# Altium PCB TLS_PWR.PcbDoc
Units mm, origin at the board's own origin, x right, y up, seen from the top; angles counter-clockwise.
Board outline 92.16 x 35.5 mm, 2 copper layers (Top Layer, Bottom Layer); 19 components, 9 nets, 40 pads, 0 vias.
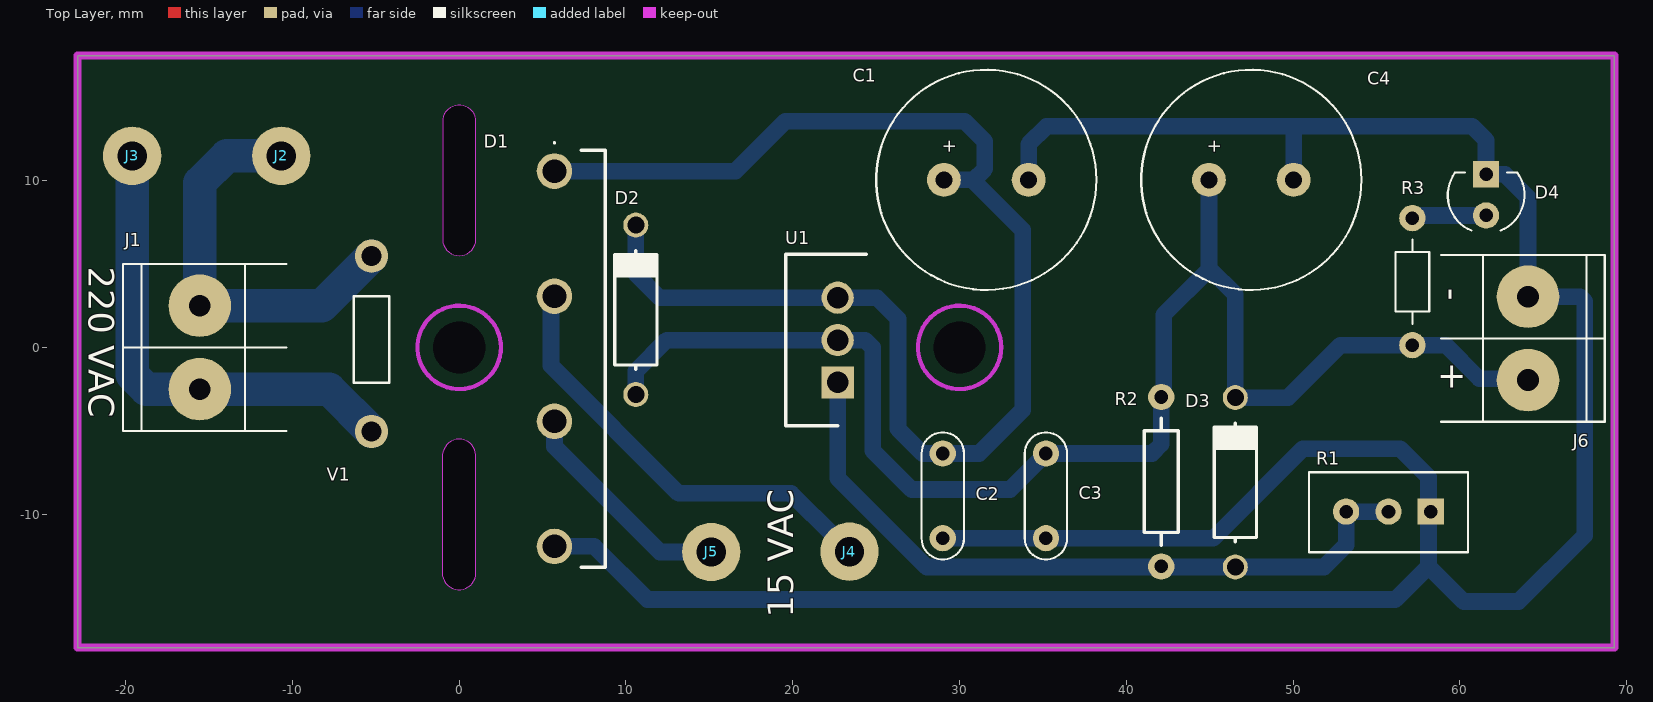
[diagram p0: Top Layer view]
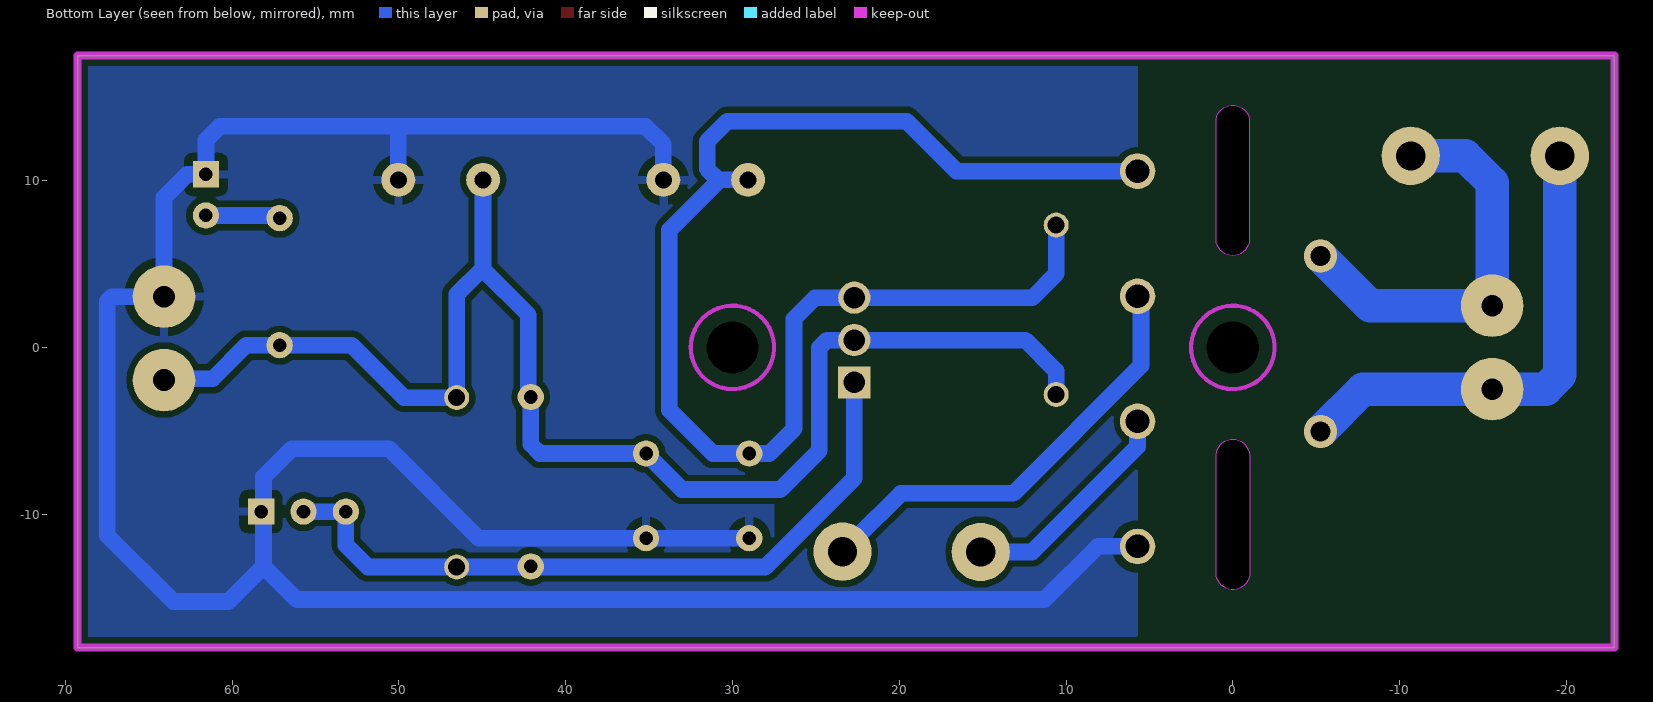
[diagram p1: Bottom Layer view, seen from below]
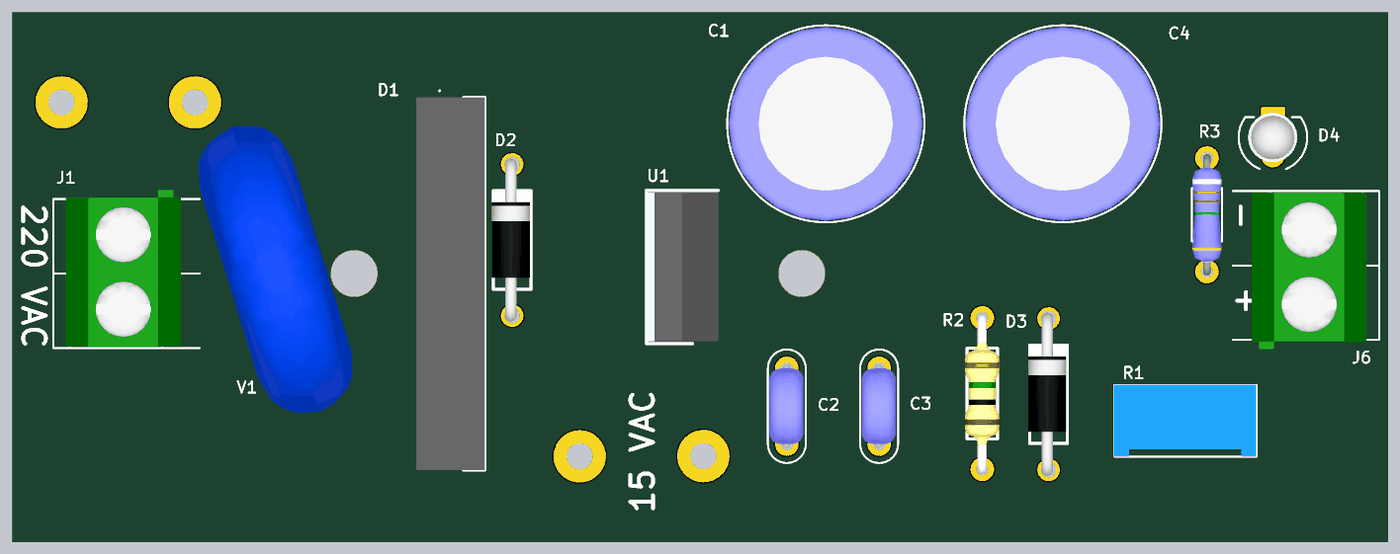
[diagram p2: 3D render of the assembled board from above, using the file's embedded part models]

## Layer stack, top to bottom
Top Solder: solder mask 0.0102, Solder Resist, Dk 3.5
Top Layer: signal copper 0.0356
Dielectric1: dielectric 0.32, FR-4, Dk 4.8
Bottom Layer: signal copper 0.0356
Bottom Solder: solder mask 0.0102, Solder Resist, Dk 3.5

## Board outline
-22.885,-18 69.271,-18 69.271,17.5 -22.885,17.5
cut-out: -1.002,-13.691 ccw(c-0.002,-13.506) 0.998,-13.691 0.998,-6.452 ccw(c-0.002,-6.505) -1.002,-6.452
cut-out: 1.002,13.691 ccw(c0.002,13.506) -0.998,13.691 -0.998,6.452 ccw(c0.002,6.505) 1.002,6.452

## Design rules (kind name [scope] priority, off if disabled: settings)
Clearance Clearance_POLY [InPolygon] p1: gap=0.381 ignorepadtopadclearanceinfootprint=FALSE except(0: Arc-Hole Track-Hole SMDPad-Hole THPad-Hole Via-Hole Fill-Hole Poly-Hole Region-Hole Text-Hole)
Clearance Clearance_U [HasFootprint('MSOP8')] p2: gap=0.203 ignorepadtopadclearanceinfootprint=FALSE except(0: Arc-Hole Track-Hole SMDPad-Hole THPad-Hole Via-Hole Fill-Hole Poly-Hole Region-Hole Text-Hole)
Clearance [All] p3: gap=0.203 ignorepadtopadclearanceinfootprint=FALSE except(0: Arc-Hole Track-Hole SMDPad-Hole THPad-Hole Via-Hole Fill-Hole Poly-Hole Region-Hole Text-Hole)
Height [All] p1: minheight=0 maxheight=50.8 prefheight=12.7
MinimumSolderMaskSliver [All] p1: minsoldermaskwidth=0.07
PolygonConnect Poly_Direct [OnLayer('Top Layer') or OnLayer('Bottom Layer')] p1: connectstyle=Relief reliefconductorwidth=0.508 reliefentries=4 polygonreliefangle="90 Angle" airgapwidth=0.508
PolygonConnect IsVia [IsVia] p2: connectstyle=Direct reliefconductorwidth=0.254 reliefentries=4 polygonreliefangle="90 Angle" airgapwidth=0.254
PolygonConnect [All] p3: connectstyle=Relief reliefconductorwidth=0.254 reliefentries=4 polygonreliefangle="90 Angle" airgapwidth=0.254
RoutingVias [All] p1: holewidth=0.711 width=1.27 viastyle="Through Hole" minholewidth=0.2 minwidth=0.5 maxholewidth=0.711 maxwidth=1.27
SilkToSilkClearance [All] p1: silktosilkclearance=0.17
SilkToSolderMaskClearance SilkscreenOverComponentPads [IsPad] p1: minsilkscreentomaskgap=0.1 clearancetoexposedcopper=TRUE
SolderMaskExpansion [All] p1: expansion=0.102
Width Logo [HasFootprint('LOGO_GL_5mm_BOARD')] p1: maxlimit=0.254 minlimit=0.01 preferedwidth=0.254
Width Width_VIN [InNet('VIN') OR InNet('NetD2_1')] p2: maxlimit=1 minlimit=0.254 preferedwidth=0.762
Width [All] p3: maxlimit=4 minlimit=0.318 preferedwidth=1
26 further rules are at their usual default settings.

## Classes and differential pairs
component class TLS_PWR: C1 C2 C3 C4 D1 D2 D3 D4 J1 J2 J3 J4 J5 J6 R1 R2 R3 U1

## Components (designator, comment, footprint, x,y, rotation, side; value= is the part's Value field where it differs from the comment)
C1 "220uF 50V" CAP500RP 31.605,10.047 r0 top
C2 "0.1uF 63V" CAP200 28.995,-8.903 r270 top
C3 "0.1uF 63V" CAP200 35.182,-8.903 r270 top
C4 "220uF 50V" CAP500RP 47.495,10.047 r0 top
D1 "KBJ406G" KBJ 5.712,10.566 r270 top
D2 "1N4007" DO41 10.591,2.25 r90 top
D3 "1N4007" DO41 46.536,-8.093 r90 top
D4 "RED" LED3_R 61.573,9.131 r90 top
J1 "BORNERA CON TORNILLO" BORNERA2 -15.555,-0.003 r0 top
J2 "PIN CABLE" PIN_CABLE#1 -10.668,11.481 r0 top
J3 "PIN CABLE" PIN_CABLE#2 -19.609,12.381 r0 top
J4 "PIN CABLE" PIN_CABLE#3 23.402,-10.25 r0 top
J5 "PIN CABLE" PIN_CABLE#1 15.113,-12.268 r0 top
J6 "BORNERA CON TORNILLO" BORNERA2 64.087,0.541 r180 top
R1 "10K" 3296W 60.485,-12.287 r180 top
R2 "220R" RES400 42.095,-13.136 r90 top
R3 "1K" RES300 57.152,7.75 r270 top
U1 "LM317" TO220 22.695,-2.103 r90 top
V1 "250V" VARTH_20 -5.258,5.472 r180 top

## Footprints (in the part's own frame and the unit in brackets; to place one, negate y for a bottom-side part, rotate by r counter-clockwise, add the part's x,y. Pads: shape width x height; smd on the part's side, far side on the other; paste and mask are expansions set on the pad)
3296W [mil]
  rect 62x62 hole 32: 1(87.6,-96.06)
  round 62 hole 32: 2(187.6,-96.06) 3(287.6,-96.06)
  silkscreen extent 0,-189 375,0, body extent 1,-190 376,0, height 375
BORNERA2 [mm] "Bornera con Tornillos 5mm separación"
  round 3.75 hole 1.3: 1(0,2.5) 2(0,-2.5)
  silkscreen extent -4.6,-5 5.2,5, body extent -3.76,-4.89 3.94,5.61, height 10
CAP200 [mil]
  round 62 hole 32: 1(-100,0) 2(100,0)
  silkscreen extent -150,-50 150,50, body extent -110,-46 110,44, height 246
CAP500RP [mil]
  round 80 hole 40: 1(-100,0) 2(100,0)
  silkscreen extent -260,-260 260,260, body extent -256,-256 256,256, height 827
DO41 [mm]
  round 1.5 hole 1.016: 1(-5.08,0) 2(5.08,0)
  silkscreen extent -3.56,-1.27 3.56,1.27, body extent -5.46,-1.19 5.46,1.37, height 2.03
KBJ [mm] "BRIDGE"
  round 2.13 hole 1.42: 1(0,0) 2(7.5,0) 3(22.5,0) 4(15,0)
  silkscreen extent -1.75,-0.05 23.75,3.05, body extent -1.25,-1.55 23.75,3.05, height 19.1
LED3_R [mil]
  round 62 hole 32: 1(-48,0)
  rect 62x62 hole 32: 2(49,0)
  silkscreen extent -84,-90 54,90, body extent -65,-64 65,65, height 94
PIN_CABLE#1 [mm]
  round 3.5 hole 1.75: 1(0,0)
PIN_CABLE#2 [mm]
  round 3.5 hole 1.75: 1(0,-0.9)
PIN_CABLE#3 [mm]
  round 3.5 hole 1.75: 1(0,-2)
RES300 [mil]
  round 62 hole 32: 1(0,0) 2(300,0)
  silkscreen extent 50,-40 250,40, body extent -10,-38 310,38, height 79
RES400 [mil]
  round 62 hole 32: 1(0,0) 2(400,0)
  silkscreen extent 50,-40 350,40, body extent -12,-45 412,46, height 96
TO220 [mm]
  rect 1.935x1.935 hole 1.29: 1(0,0)
  round 1.935 hole 1.29: 2(2.54,0) 3(5.08,0)
  silkscreen extent -2.6,-1.71 7.68,3.11, body extent -2.44,-1.71 7.52,3.11, height 18.48
VARTH_20 [mm] "Diam 20mm"
  round 2 hole 1.2: 1(0,0) 2(0,10.516)
  silkscreen extent -1.07,2.42 1.07,7.6, body extent -6.02,-5.32 6.05,15.71, height 27

## Part data
C1 C4: library part CAP_ELECT_220uF_50V, "CAP ELECT 220uF 50V"
C2 C3: library part CAP_FILM_100nF_CAP200, "CAP FILM 0.1UF 5% 63VDC RADIAL"
D1: library part BRD_4A_KBJ, "DIODE BRIDGE 600V 4A"
D2 D3: library part 1N4007_DO41, "RECTIFIER 1A 1000V DO-41"
D4: library part LED3_ROJO, "LED RED DIFFUSED T-1 T/H"
J1 J6: library part BORNERA2_5mm_TORNILLO, "BORNERA CON TORNILLO PASO 5mm (2 CONTACTOS)"
J2 J3 J4 J5: library part PIN_1_CABLE_1mm, "PIN PARA SOLDAR CABLE 1MM"
R1: library part TRIMMER_3296W_10K, "3296W TRIMMER 10K OHM 0.5W PC PIN"
R2: library part RES400_220R_1%, "RES 220 OHM 1/4W 1% AXIAL"
R3: library part RES300_1K_5%, "RES METAL FILM 1K 5% 1/8W"
U1: library part LM317_TO220, "IC REG LIN POS ADJ 1.5A TO220AB"
V1: library part VARTH_250V, "VARISTOR 390V 10KA DISC 20MM"

## Free pads (board coordinates)
  round 1.524 hole 3.125: 2(0,0) 2(30,0)

## Nets (pads, with @x,y where several pads share a name; then routed paths per layer and width w, separated by ;. In a path a pad name is that pad's centre, name@x,y a point inside that pad or via, vN(x,y) a via of type N, cw(c..) or ccw(c..) an arc to the next point about the centre after c; other vN are vias at no path point)
GND: C1.2 C2.2 C3.2 C4.2 D1.3 D4.2 J6.2 R1.1 | length 166.1
  Bottom Layer w1: D1.3 8.098,-11.934 11.278,-15.113 56.134,-15.113 58.118,-13.129 ; C2.2 C3.2 45.216,-11.443 50.588,-6.071 56.416,-6.071 58.118,-7.772 58.118,-13.129 ; C1.2 34.145,12.184 35.211,13.25 49.987,13.25 ; C4.2 50.035,13.202 49.987,13.25 ; 49.987,13.25 60.75,13.25 61.573,12.427 D4.2 62.703,10.375 64.087,8.992 J6.2 67.216,3.041 67.488,2.769 67.488,-11.278 63.525,-15.24 60.229,-15.24 58.118,-13.129
NetC1_1: C1.1 C2.1 D1.1 D2.2 U1.3 | length 82.4
  Bottom Layer w1: D1.1 16.566,10.566 19.566,13.566 30.299,13.566 31.521,12.344 31.521,10.706 30.815,10 33.782,7.033 33.782,-3.759 31.178,-6.363 C2.1 27.79,-6.363 26.314,-4.888 26.314,1.716 25.054,2.977 U1.3 12.023,2.977 10.591,4.409 D2.2 ; C1.1 30.769,10.047
NetC3_1: C3.1 C4.1 D2.1 D3.2 J6.1 R2.2 R3.2 U1.2 | length 87.1
  Bottom Layer w1: D2.1 10.591,-1.409 12.437,0.437 U1.2 24.343,0.437 24.79,-0.011 24.79,-6.183 27.13,-8.523 33.022,-8.523 C3.1 41.539,-6.363 42.095,-5.807 R2.2 ; R2.2@42.243,-2.828 42.243,1.957 44.955,4.669 C4.1 ; 45,4.714 46.536,3.178 D3.2 49.695,-3.013 52.838,0.13 R3.2 59.154,0.13 61.163,-1.88 64.008,-1.88 J6.1
NetD1_2: D1.2 J4.1 | length 27.6
  Bottom Layer w1: D1.2 5.5,2.854 5.5,-1.095 13.155,-8.75 19.902,-8.75 22.551,-11.399 23.402,-11.399 J4.1@22.533,-12.268
NetD1_4: D1.4 J5.1 | length 13.5
  Bottom Layer w1: D1.4 5.712,-5.944 12.037,-12.268 J5.1
NetD3_1: D3.1 R1.2 R1.3 R2.1 U1.1 | length 43.5
  Bottom Layer w1: U1.1 22.695,-7.836 28.032,-13.173 D3.1 51.854,-13.173 53.18,-11.847 R1.3 R1.2
NetD4_1: D4.1 R3.1 | length 4.3
  Bottom Layer w1: R3.1@57.314,7.912 D4.1
NetJ1_1: J1.1 J2.1 V1.1 | length 24.5
  Bottom Layer w2: J2.1 -13.945,11.481 -15.555,9.871 J1.1 -8.233,2.497 V1.1
NetJ1_2: J1.2 J3.1 V1.2 | length 28.9
  Bottom Layer w2: J3.1 -19.609,-1.651 -18.757,-2.503 J1.2 -7.798,-2.503 V1.2
copper on no net: | length 0.4
  Top Layer w1: -0.254,0.254 0,0

## Polygon pours and split planes (outlines as drawn)
GND on Bottom Layer "DC" (solid, remove dead copper, pour order 0): 5.712,-18 69.271,-18 69.271,17.5 5.713,17.5

## Keep-outs
Keep-Out Layer:
  circle w0.254: c0,0 r2.5
  circle w0.254: c30,0 r2.5
  lines w0.5: -22.885,-18 -22.885,17.5 69.271,17.5 69.271,-18 -22.885,-18

## Other copper
Bottom Layer:
  pour cut-out: 27.594,-11.479 27.5,-11.384 27.5,-3 22.695,-3 23.5,-3.805 23.5,-11.5 27.573,-11.5

## Silkscreen, mask and mechanical layers (free items; w line width, h text height)
Top Overlay:
  text "220 VAC" at -22.2,4.826 h1.52 r270
  text "-" at 59.995,2.794 h1.52 r90
  text "+" at 58.649,-2.413 h1.52
  text "15 VAC" at 20.041,-16.205 h1.52 r90
Mechanical 4:
  lines w0.127: -1.002,-13.515 ccw(c-0.002,-13.515) 0.998,-13.515 ; -1.002,-6.515 cw(c-0.002,-6.515) 0.998,-6.515 ; -1,-13.515 -1,-6.515 ; -1,6.515 -1,13.515 ; -0.998,6.515 ccw(c0.002,6.515) 1.002,6.515 ; -0.998,13.515 cw(c0.002,13.515) 1.002,13.515 ; 1,-13.515 1,-6.515 ; 1,6.515 1,13.515

## Text inside footprints (layer, text, board x,y; h text height)
C1: Top Overlay "+" at 29.751,11.622 h0.76 r90
C4: Top Overlay "+" at 45.641,11.622 h0.76 r90